# EAGLE board adalogger_shield_v1 (EAGLE 8.5.2)
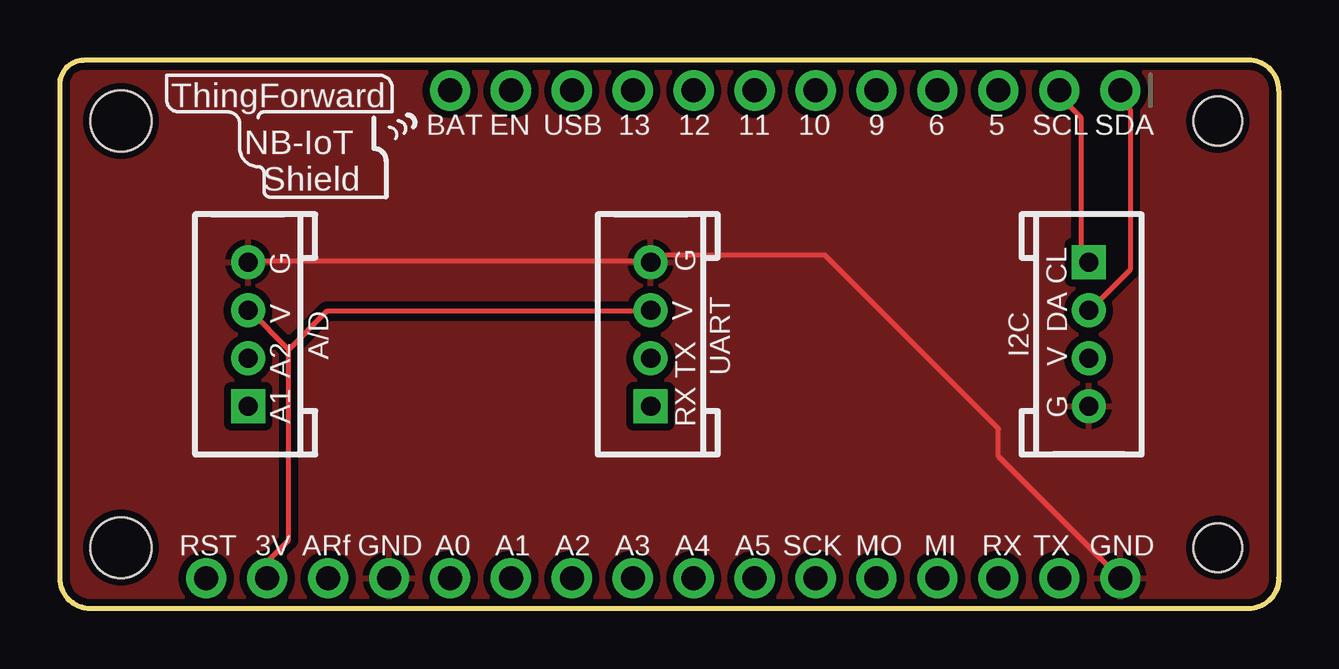
[diagram p0: board, top side]
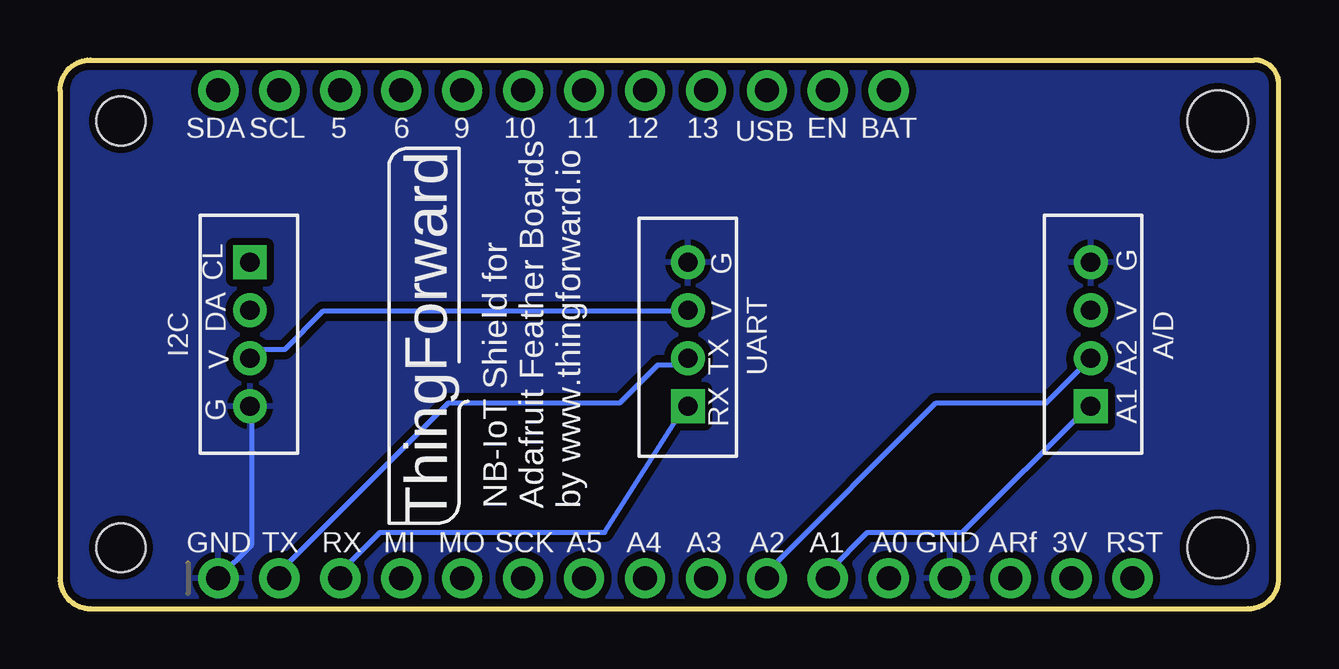
[diagram p1: board, bottom side, seen from below]

Size 50.8 x 22.86 mm. Coordinates in mm from the lower left corner, seen from the top.
Outline: 50.8,21.59 arc90 49.53,22.86 1.02,22.86 arc90 0,21.84 0,1.27 arc90 1.27,0 49.53,0 arc90 50.8,1.27 50.8,21.59
Copper layers (1*16): Top 0.035mm / dielectric 1.5mm / Bottom 0.035mm
Design rules "SparkFun": minimum track width 8mil, minimum drill 20mil, track to track 8mil, track to pad 8mil, pad to pad 8mil, via to via 8mil, smd to smd 8mil, copper to edge 8mil, drill to drill 8mil, minimum pad ring 12mil, minimum via ring 10mil, stop-mask expansion 4mil, vias tented up to drill 20mil, thermal gap 10mil
Holes 2.54 mm at 2.54,20.32 2.54,2.54
Holes 2.03 mm at 48.26,20.32 48.26,2.54

## Footprints (pad centres in the part's own frame; a part is rotated, then mirrored left to right if it is on the bottom)
HW4-2.0 = drill 0.8 pad 1.27 square: 1 -3,0 | drill 0.8 pad 1.27: 2 -1,0; 3 1,0; 4 3,0
1X12_ROUND = drill 1 pad 1.676: 1 -13.97,0; 2 -11.43,0; 3 -8.89,0; 4 -6.35,0; 5 -3.81,0; 6 -1.27,0; 7 1.27,0; 8 3.81,0; 9 6.35,0; 10 8.89,0; 11 11.43,0; 12 13.97,0
1X16_ROUND = drill 1 pad 1.676: 1 -19.05,0; 2 -16.51,0; 3 -13.97,0; 4 -11.43,0; 5 -8.89,0; 6 -6.35,0; 7 -3.81,0; 8 -1.27,0; 9 1.27,0; 10 3.81,0; 11 6.35,0; 12 8.89,0; 13 11.43,0; 14 13.97,0; 15 16.51,0; 16 19.05,0

## Placement (x,y rotation side)
A/D  4P-2.0  [HW4-2.0]  7.84,11.43 90 top
I2C  4P-2.0  [HW4-2.0]  42.88,11.43 270 top
JP1  [1X12_ROUND]  30.23,21.59 180 top
JP2  [1X16_ROUND]  25.15,1.27 0 bottom
UART  4P-2.0  [HW4-2.0]  24.62,11.43 90 top

## Library data of the parts
A/D I2C UART = Seeed-Connector -2016
JP1 JP2 = microbuilder

## Nets
3V: A/D.3 I2C.3 JP2.15 UART.3
A0: JP2.12
A1: A/D.1 JP2.11
A2: A/D.2 JP2.10
A3: JP2.9
A4: JP2.8
A5: JP2.7
ARF: JP2.14
EN: JP1.11
GND: A/D.4 I2C.4 JP2.1 JP2.13 UART.4
IO12: JP1.8
IO13: JP1.9
IO14: JP1.3
IO15: JP1.5
IO27: JP1.7
IO32: JP1.4
IO33: JP1.6
MISO: JP2.4
MOSI: JP2.5
RST: JP2.16
RX: JP2.3 UART.1
SCK: JP2.6
SCL: I2C.1 JP1.2
SDA: I2C.2 JP1.1
TX: JP2.2 UART.2
VBAT: JP1.12
VBUS: JP1.10

## Tracks (layer width: path | path; a pad name or v marks a point on that pad's centre or on a via)
3V
  Top 0.203: 9.53,10.79 7.94,12.38 A/D.3 | 9.53,10.79 9.53,2.86 8.73,2.06 8.73,1.27 JP2.15 | 9.53,10.79 11.11,12.38 24.61,12.38 UART.3
  Bottom 0.203: I2C.3 42.86,10.48 42.55,10.79 41.43,10.79 39.85,12.38 24.77,12.38 UART.3
A1
  Bottom 0.203: A/D.1 7.94,8.41 13.18,3.17 17.14,3.17 18.73,1.59 18.73,1.27 JP2.11
A2
  Bottom 0.203: A/D.2 7.94,10.32 9.68,8.57 14.29,8.57 21.27,1.59 21.27,1.27 JP2.10
GND
  Top 0.203: JP2.1 39.12,6.35 39.12,7.49 31.88,14.73 24.89,14.73 24.64,14.48 7.87,14.48
  Bottom 0.203: JP2.1 42.8,2.67 42.8,8.38
  pour Top (isolate 0.305): 0,1.27 0,21.84 arc-90 1.02,22.86 49.53,22.86 arc-90 50.8,21.59 50.8,1.27 arc-90 49.53,0 1.27,0 arc-90
  pour Bottom (isolate 0.305): 0,1.27 0,21.84 arc-90 1.02,22.86 49.53,22.86 arc-90 50.8,21.59 50.8,1.27 arc-90 49.53,0 1.27,0 arc-90
RX
  Bottom 0.203: UART.1 24.77,8.41 28.1,3.17 37.47,3.17 39.05,1.59 39.05,1.27 JP2.3
SCL
  Top 0.203: I2C.1 42.86,14.45 42.55,14.76 42.55,20.48 41.75,21.27 41.75,21.59 JP1.2
SDA
  Top 0.203: I2C.2 43.02,12.54 44.61,14.13 44.61,20.8 44.29,21.11 44.29,21.59 JP1.1
TX
  Bottom 0.203: UART.2 24.77,10.32 24.92,10.16 25.88,10.16 27.46,8.57 34.61,8.57 41.59,1.59 41.59,1.27 JP2.2

## Text on the board
tPlace: ThingForward | BAT | EN | USB | 13 | 12 | 11 | 10 | 9 | 6 | 5 | SCL | SDA | NB-IoT / Shield | CL | G | G | V | A/D | V | DA | A2 | TX | UART | I2C | V | A1 | RX | G | RST | 3V | ARf | GND | A0 | A1 | A2 | A3 | A4 | A5 | SCK | MO | MI | RX | TX | GND
bPlace: BAT | EN | USB | 13 | 12 | 11 | 10 | 9 | 6 | 5 | SCL | SDA | ThingForward | G | G | CL | A/D | V | V | DA | A2 | UART | TX | V | I2C | A1 | RX | G | NB-IoT Shield for / Adafruit Feather Boards / by www.thingforward.io | RST | 3V | ARf | GND | A0 | A1 | A2 | A3 | A4 | A5 | SCK | MO | MI | RX | TX | GND